# Altium PCB netuitval.PcbDoc (part 1 of 2)
Units mil, origin at the board's own origin, x right, y up, seen from the top; angles counter-clockwise.
Board outline 3892 x 5388 mil, 2 copper layers (Top Layer, Bottom Layer); 66 components, 53 nets, 247 pads, 55 vias.
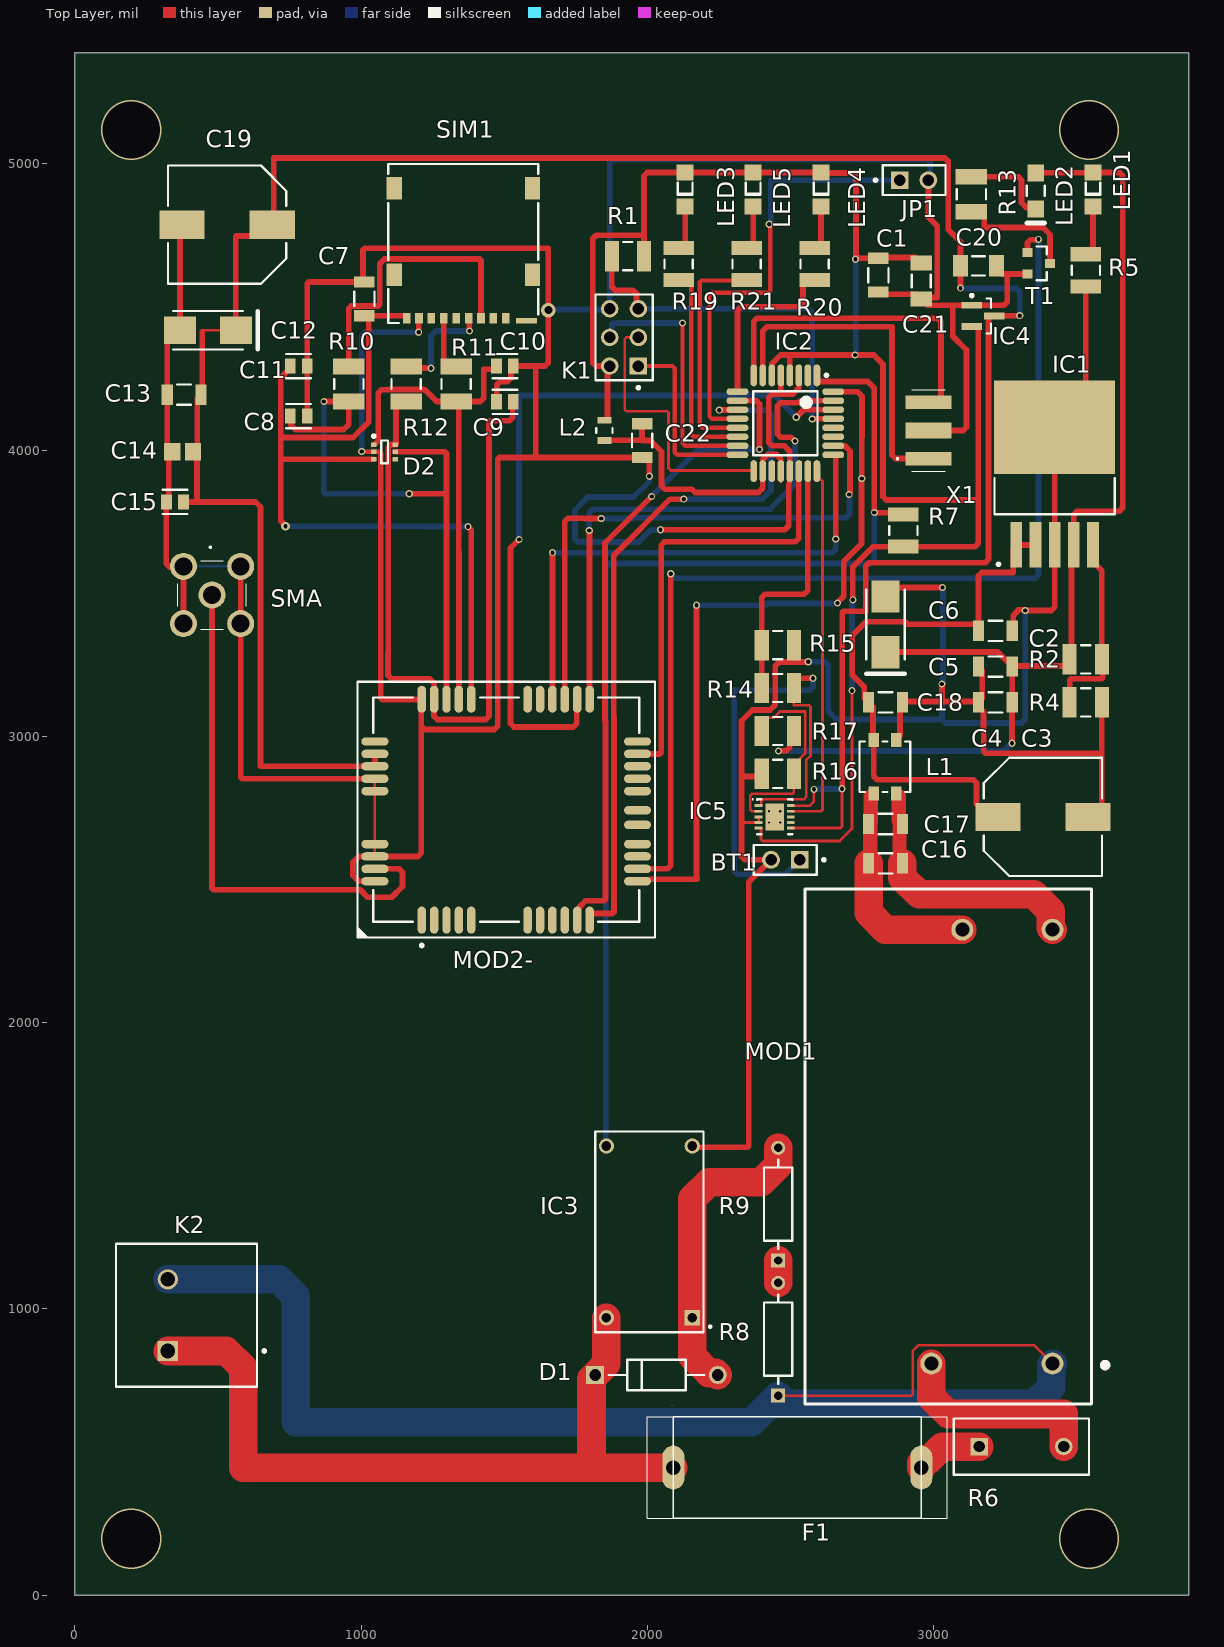
[diagram p0: Top Layer view]
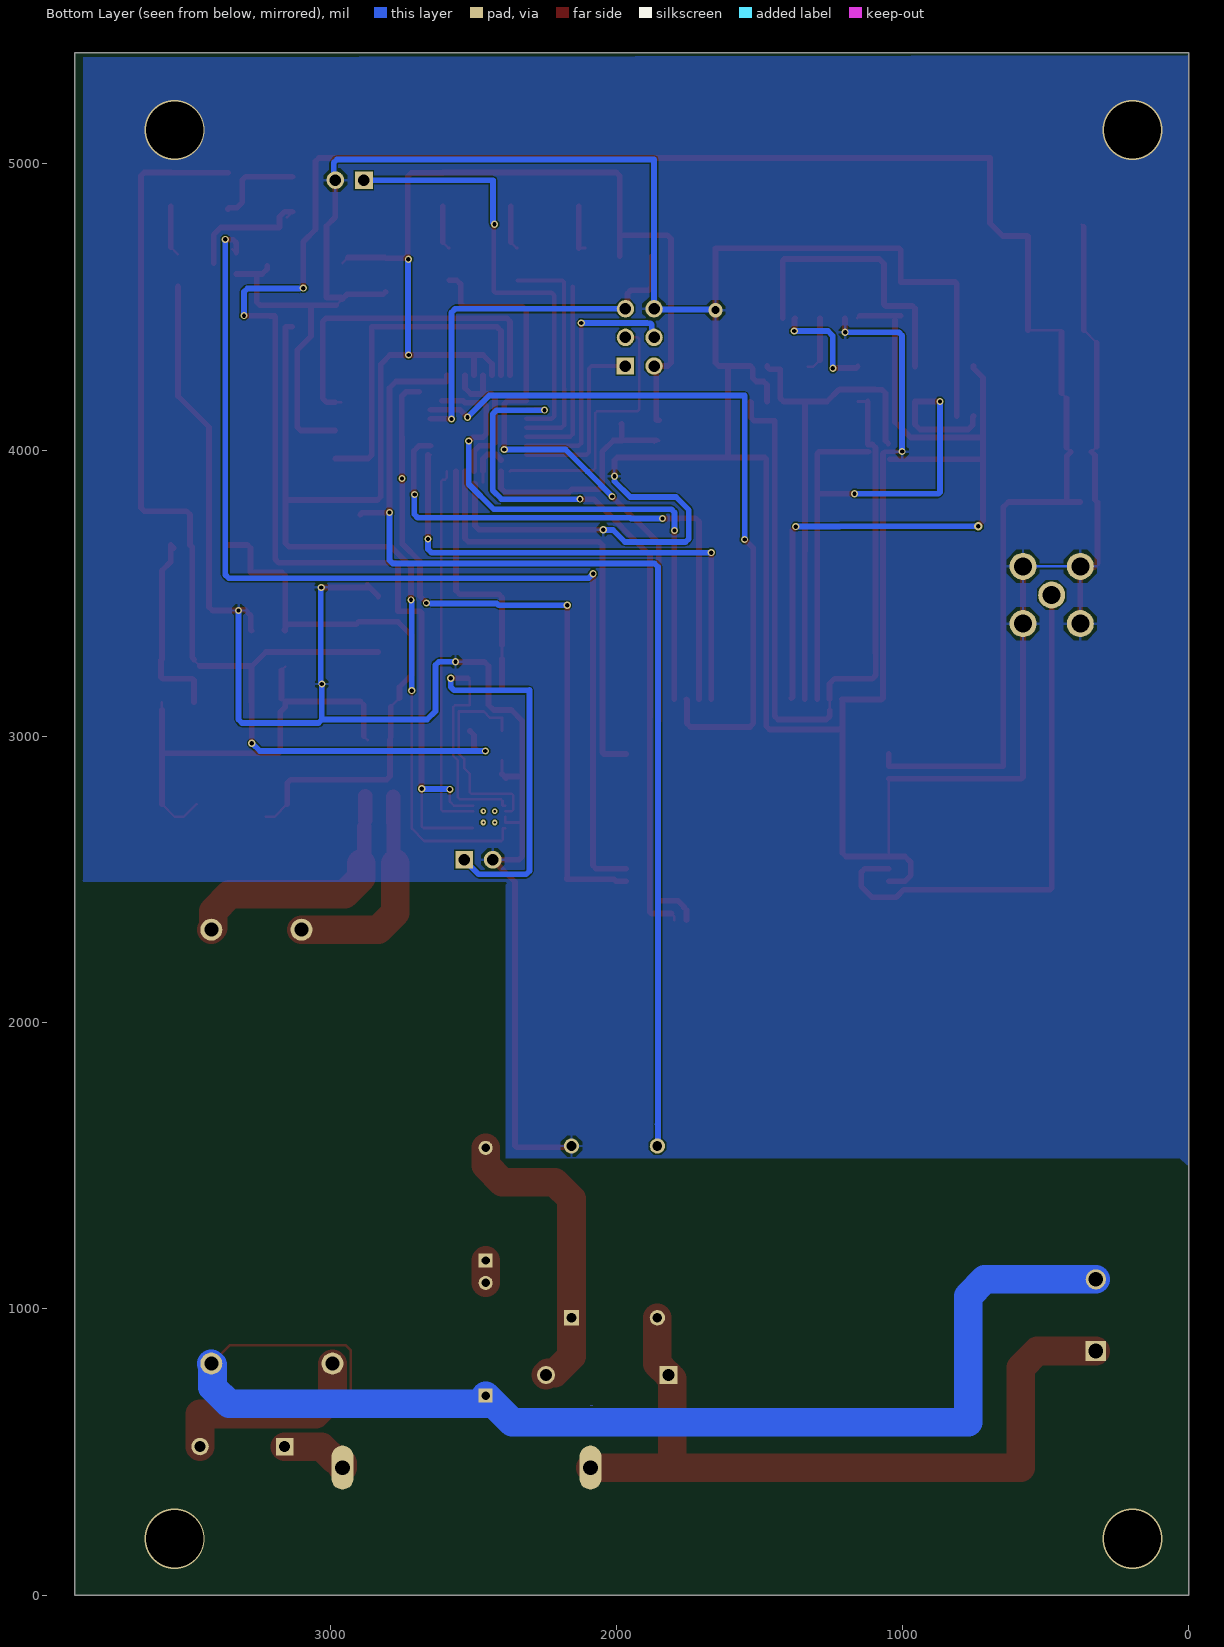
[diagram p1: Bottom Layer view, seen from below]
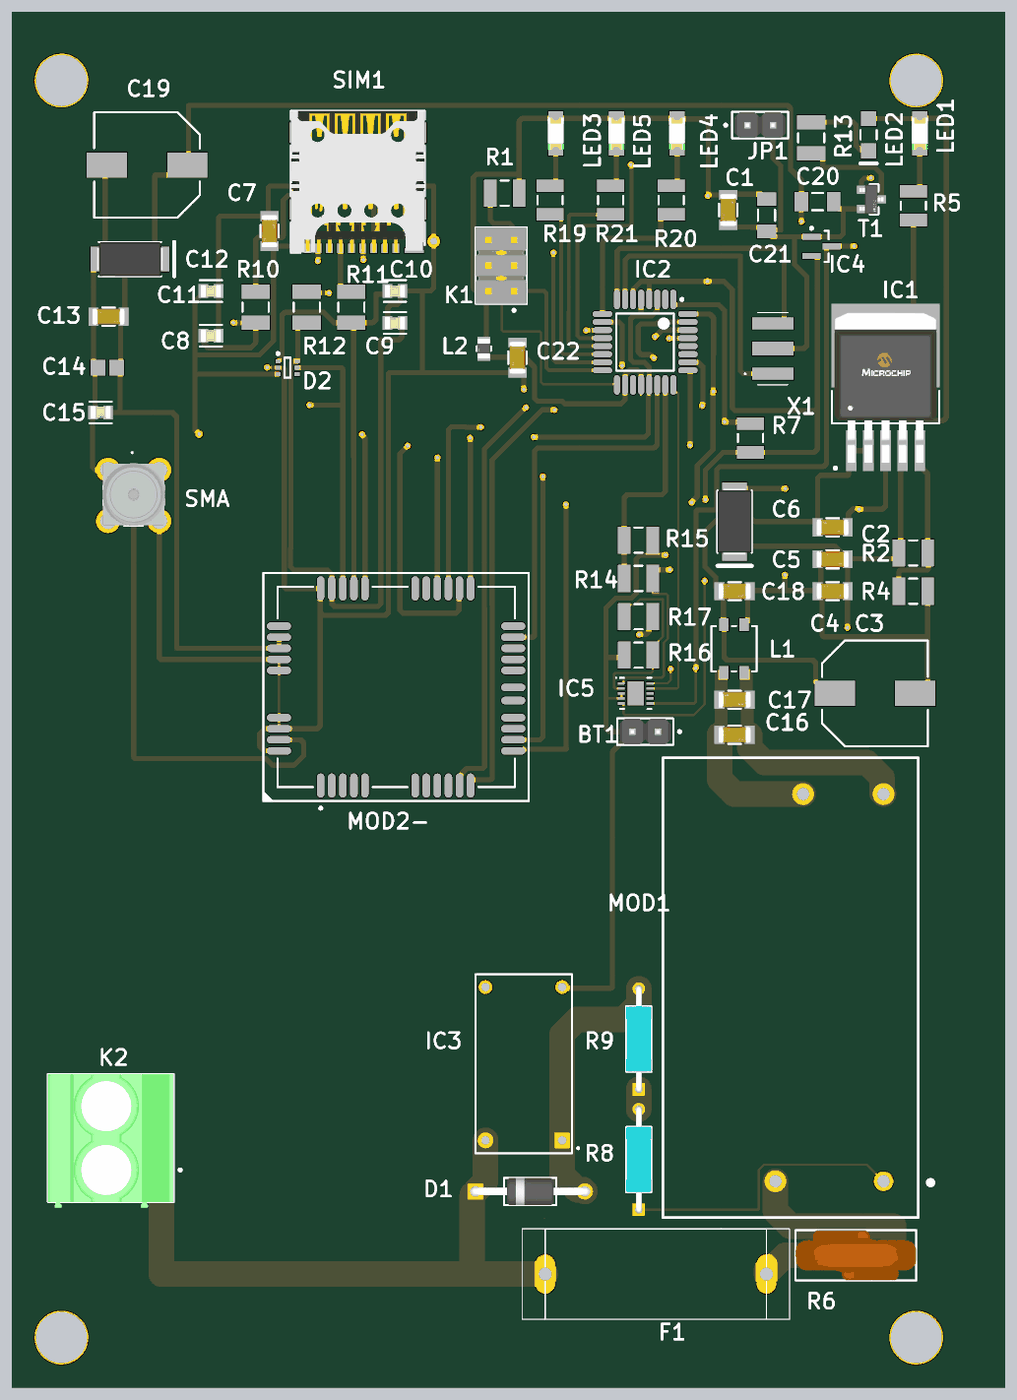
[diagram p2: 3D render of the assembled board from above, using the file's embedded part models]

## Layer stack, top to bottom
Top Solder: solder mask 0.4, Solder Resist, Dk 3.5
Top Layer: signal copper 1.4
Dielectric 1: dielectric 12.6, FR-4, Dk 4.8
Bottom Layer: signal copper 1.4
Bottom Solder: solder mask 0.4, Solder Resist, Dk 3.5

## Board outline
0,0 3892,0 3892,5388 0,5388

## Design rules (kind name [scope] priority, off if disabled: settings)
Clearance [All] p1: gap=8 ignorepadtopadclearanceinfootprint=FALSE
PolygonConnect [All] p1: connectstyle=Relief reliefconductorwidth=10 reliefentries=4 polygonreliefangle="90 Angle" airgapwidth=10
RoutingVias [All] p1: holewidth=28 width=50 viastyle="Through Hole" minholewidth=28 minwidth=50 maxholewidth=28 maxwidth=50
SolderMaskExpansion [All] p1: expansion=4 istentingtop=FALSE
Width [All] p1: maxlimit=100 minlimit=9 preferedwidth=20 minimp=50.000000 maximp=50.000000 favimp=50.000000
30 further rules are at their usual default settings.

## Classes and differential pairs
component class Schema_rechtsonder: C7 C8 C9 C10 C11 C12 C13 C15 C19 C20 C21 IC4 LED2 MOD2- R11 R12 SIM1 T1
component class Schema_linksonder: BT1 C1 C2 C3 C4 C5 C6 C16 C17 C18 C22 D1 D2 F1 IC1 IC3 IC5 K2 L2 LED1 R1 R2 R4 R5 R7 R8 R9 R14 R15 R16 R17 R19 R20 R21 X1

## Components (designator, comment, footprint, x,y, rotation, side; value= is the part's Value field where it differs from the comment)
BT1 "" FP-M20-9990246-MFG 2482,2569 r180 top
C1 "100nF" FP-CC1206-1_25-MFG 2807,4611.52 r270 top value="100 nF"
C2 "100nF" FP-CC1206-1_25-MFG 3216.06,3369 r0 top value="100 nF"
C3 "1000uF/10V" NIC-CAPA2-10X10_V 3382,2719 r0 top
C4 "100nF" FP-CC1206-1_25-MFG 3216.05,3119 r180 top value="100 nF"
C5 "100nF" FP-CC1206-1_25-MFG 3216.06,3244 r180 top value="100 nF"
C6 "100uF/16V" AVX-TAJ-C-2_M 2832,3391.44 r90 top
C7 "100nF" FP-CC1206-1_25-MFG 1011.43,4528.78 r90 top value="100 nF"
C8 "33pF" FP-C0805C-DN-MFG 782,4119 r0 top value="33 pF"
C9 "33pF" FP-C0805C-DN-MFG 1502.47,4169 r0 top value="33 pF"
C10 "33pF" FP-C0805C-DN-MFG 1502.47,4294 r0 top value="33 pF"
C11 "33pF" FP-C0805C-DN-MFG 782,4294 r0 top value="33 pF"
C12 "100uF/16V" AVX-TAJ-C-2_M 465.07,4419 r180 top
C13 "100nF" FP-CC1206-1_25-MFG 381.41,4194 r180 top value="100 nF"
C14 "10pF" CAPC2013X145X50ML20T20 376.49,3994 r0 top
C15 "33pF" FP-C0805C-DN-MFG 349.91,3819 r180 top value="33 pF"
C16 "100nF" FP-CC1206-1_25-MFG 2832,2556.6 r0 top value="100 nF"
C17 "100nF" FP-CC1206-1_25-MFG 2832,2694 r0 top value="100 nF"
C18 "100nF" FP-CC1206-1_25-MFG 2832,3119 r0 top value="100 nF"
C19 "1000uF/10V" NIC-CAPA2-10X10_V 532,4787.7 r180 top
C20 "1uF" CAPC1206(3216)130_M 3157,4644 r180 top
C21 "1uF" CAPC1206(3216)130_M 2957,4590.85 r90 top
C22 "100nF" FP-CC1206-1_25-MFG 1982,4033.57 r270 top value="100 nF"
D1 "1N4007" FP-1N4007-MFG 2032,769 r0 top value=15pF
D2 "SMF05CT2G" ONSC-SC70-6-419B-02_W_V 1082,3994 r0 top
F1 "315mA" MC000827 2090.86,622.8 r0 top
IC1 "MIC29302WU-TR" FP-C04-012-MFG 3423,3965.75 r0 top
IC2 "ATmega328P-AU" 32A_M 2482,4094 r270 top
IC3 "CNY65B" DIP762W50P1524L1780H610Q4 2007,1269 r180 top
IC4 "MCP1700T-2802E/TT" SOT-23-TT3_M 3172.75,4469 r0 top
IC5 "LTC4413" LT-DD-10_V 2444.99,2719 r0 top
JP1 "closed=factory defaults" FP-M20-9990246-MFG 2932,4943.41 r0 top
K1 "ISP" SMTC-TSW-103-08-L-D_V 1918.61,4394 r90 top
K2 "" PHOE-1714955_V 325,978 r90 top
L1 "ACM4520-231-2P-T" ACM4520 2830.03,2894 r90 top
L2 "BLM21AJ601SN1D" FP-BLM21-0_2-t0_85-e0_5-MFG 1850.11,4069 r270 top
LED1 "POWER" 1206_A 3557,4910.73 r90 top
LED2 "NET" LUMX-SML-LX1206GC-TR_V 3357,4905.81 r270 top
LED3 "" 1206_A 2132,4910.73 r90 top
LED4 "" 1206_A 2607,4910.73 r90 top
LED5 "" 1206_A 2369.5,4910.73 r90 top
MOD1 "IRM-10-5" IRM-10 3551.06,667.27 r90 top
MOD2- "M95FA-03-STD" QUEC-M95FA-03-STD_V 1507,2744 r90 top
R1 "10K" RESC3225X70X50NL20T20 1932,4677.66 r0 top
R2 "110K" RESC3225X70X50NL20T20 3531.61,3269 r0 top
R4 "43K" RESC3225X70X50NL20T20 3531.61,3119 r180 top
R5 "1K" RESC3225X70X50NL20T20 3532,4628.25 r90 top
R6 "NTC" FP-NTPAA-MFG 3307,519 r0 top
R7 "4K7" RESC3225X70X50NL20T20 2894.4,3719 r270 top
R8 "47K" FP-MRS25-MFG 2457,894 r90 top value=1.1kΩ
R9 "47K" FP-MRS25-MFG 2457,1365.85 r90 top value=1.1kΩ
R10 "22R" RESC3225X60X45ML20T20 957,4231.01 r90 top
R11 "22R" RESC3225X60X45ML20T20 1332,4231.01 r270 top
R12 "22R" RESC3225X60X45ML20T20 1157,4231.01 r270 top
R13 "1K" RESC3225X60X45ML20T20 3132,4894 r90 top
R14 "100K" RESC3225X70X50NL20T20 2455.82,3169 r180 top
R15 "100K" RESC3225X70X50NL20T20 2455.82,3319 r180 top
R16 "470K" RESC3225X70X50NL20T20 2455.82,2869 r0 top
R17 "1M" RESC3225X70X50NL20T20 2455.82,3019 r0 top
R19 "470R" RESC3225X70X50NL20T20 2109.36,4650.1 r90 top
R20 "1K" RESC3225X70X50NL20T20 2584.36,4650.1 r90 top
R21 "1K" RESC3225X70X50NL20T20 2346.86,4650.1 r90 top
SIM1 "693023010811" 693023010811 1357,4721.76 r180 top
SMA "73391-0070" 733910070 479.44,3494 r0 top
T1 "2N7002-7-F" FP-SOT23-MFG 3367.63,4652.86 r0 top
X1 "" CSTCC8M00G53R0 2982,4068.8 r270 top

## Footprints (in the part's own frame and the unit in brackets; to place one, negate y for a bottom-side part, rotate by r counter-clockwise, add the part's x,y. Pads: shape width x height; smd on the part's side, far side on the other; paste and mask are expansions set on the pad)
32A_M [mm] "Thin QFP, 32-Leads, Body 7x7mm, Pitch 0.8mm, IPC Low Density"
  oval 1.95x0.6 smd: 1(-4.25,2.8) 2(-4.25,2) 3(-4.25,1.2) 4(-4.25,0.4) 5(-4.25,-0.4) 6(-4.25,-1.2) 7(-4.25,-2) 8(-4.25,-2.8) 17(4.25,-2.8) 18(4.25,-2) 19(4.25,-1.2) 20(4.25,-0.4) 21(4.25,0.4) 22(4.25,1.2) 23(4.25,2) 24(4.25,2.8)
  oval 0.6x1.95 smd: 9(-2.8,-4.25) 10(-2,-4.25) 11(-1.2,-4.25) 12(-0.4,-4.25) 13(0.4,-4.25) 14(1.2,-4.25) 15(2,-4.25) 16(2.8,-4.25) 25(2.8,4.25) 26(2,4.25) 27(1.2,4.25) 28(0.4,4.25) 29(-0.4,4.25) 30(-1.2,4.25) 31(-2,4.25) 32(-2.8,4.25)
  silkscreen extent -4.37,-2.85 2.85,3.78, body extent -3.5,-3.5 3.5,3.5, height 1.2
1206_A [mm] "Chip LED, 2-Leads, Body 3.2x1.6mm, IPC Medium Density"
  rect 1.4x1.5 smd: 1(-1.5,0) 2(1.5,0)
  silkscreen extent -0.5,-0.67 0.6,0.65, body extent -1.6,-0.8 1.6,0.8, height 0.68
733910070 [mm]
  round 2.4 hole 1.6: 1(0,0) 2(-2.54,2.54) 3(-2.54,-2.54) 4(2.54,-2.54) 5(2.54,2.54)
  silkscreen extent -3.04,-3.04 3.04,4.3, body extent -3.12,-3.03 3.12,3.21, height 9.54
693023010811 [mm] "Micro SIM Card Connector (Mega SIM) Push & Pull - with Card Detection - 8 Pins"
  rect 0.67x0.95 smd: C1(5.03,6.625) C2(1.73,6.625) C3(-0.47,6.625) C4(-2.67,6.625) C5(3.93,6.625) C6(0.63,6.625) C7(-1.57,6.625) C8(-3.77,6.625) SW(2.83,6.625)
  rect 1.35x2 smd: Shield(-6.13,2.75) Shield(-6.13,-4.9) Shield(6.13,2.75) Shield(6.13,-4.9)
  rect 1.89x0.5 smd: Shield(-5.615,6.85)
  silkscreen extent -6.65,-7.05 6.65,7.05, body extent -6.65,-7.05 6.65,7.05, height 1.3
ACM4520 [mm]
  rect 1.25x0.95 smd: 1(-2.375,1) 2(-2.375,-1) 3(2.375,-1) 4(2.375,1)
  silkscreen extent -2.25,-2.25 2.25,2.25
AVX-TAJ-C-2_M [mm] "Molded Capacitor, 2-Leads, Body 6.2x3.4mm, IPC Low Density"
  rect 2.85x2.45 smd: 1(-2.475,0) 2(2.475,0)
  silkscreen extent -4.4,-1.7 3.1,1.7, body extent -3.32,-1.7 3.32,1.7, height 2.8
CAPC1206(3216)130_M [mm] "Chip Capacitor, Body 3.2x1.6mm, Height 1.3mm, IPC Low Density"
  rect 1.35x1.9 smd: 1(-1.6,0) 2(1.6,0)
  silkscreen extent -0.55,-0.85 0.55,0.85, body extent -1.7,-0.9 1.7,0.9, height 1.3
CAPC2013X145X50ML20T20 [mm] "Chip Capacitor, 2-Leads, Body 2.00x1.25mm, IPC Low Density"
  rect 1.45x1.55 smd: 1(-0.925,0) 2(0.925,0)
  body extent -1.1,-0.72 1.1,0.72, height 1.45
CSTCC8M00G53R0 [mm]
  rect 1.2x4.1 smd: 1(2.5,0) 3(-2.5,0)
  rect 1.4x4.1 smd: 2(0,0)
  silkscreen extent -3.6,-2.8 3.6,1.5
DIP762W50P1524L1780H610Q4 [mm]
  rect 1.358x1.358 hole 0.85: 1(-3.81,7.62)
  round 1.358 hole 0.85: 2(-3.81,-7.62) 3(3.81,-7.62) 4(3.81,7.62)
  silkscreen extent -5.5,-8.9 4.8,8.9
FP-1N4007-MFG [mm]
  rect 1.6x1.6 hole 1.05 paste-1000 mask+0: 1(-5.438,0)
  round 1.6 hole 1.05 paste-1000 mask+0: 2(5.438,0)
  silkscreen extent -4.24,-1.35 4.24,1.35, body extent -6.34,-1.45 6.34,1.45, height 0.25
FP-BLM21-0_2-t0_85-e0_5-MFG [mm]
  rect 0.6x1.25 smd paste+0 mask+0: 1(-0.9,0) 2(0.9,0)
  silkscreen extent -0.23,-0.73 0.22,0.72, body extent -1.3,-0.82 1.3,0.82, height 0.25
FP-C04-012-MFG [mil]
  rect 41x159 smd paste+0 mask+0: 1(-134,-296.75) 2(-67,-296.75) 3(0,-296.75) 4(67,-296.75) 5(134,-296.75)
  rect 423x327 smd paste+0 mask+0: 6(0,114.75)
  silkscreen extent -210,-370 210,-64, body extent -215,-380 215,282, height 10
FP-C0805C-DN-MFG [mm]
  rect 0.95x1.35 smd paste+0 mask+0: 1(-0.75,0) 2(0.75,0)
  silkscreen extent -1.1,-1.07 1.1,1.07, body extent -1.4,-0.85 1.4,0.85, height 0.25
FP-CC1206-1_25-MFG [mm]
  rect 1x1.8 smd paste+0 mask+0: 1(-1.5,0) 2(1.5,0)
  silkscreen extent -0.63,-0.9 0.62,0.9, body extent -2.2,-1.25 2.2,1.25, height 0.25
FP-M20-9990246-MFG [mm]
  rect 1.57x1.57 hole 1.02 paste-1000 mask+0: 1(-1.27,0)
  round 1.57 hole 1.02 paste-1000 mask+0: 2(1.27,0)
  silkscreen extent -3.55,-1.32 2.79,1.32, body extent -2.89,-1.42 2.89,1.42, height 0.25
FP-MRS25-MFG [mm]
  rect 1.25x1.25 hole 0.75 paste-1000 mask+0: 1(-5,0)
  round 1.25 hole 0.75 paste-1000 mask+0: 2(5,0)
  silkscreen extent -3.97,-1.25 3.98,1.25, body extent -5.72,-1.35 5.72,1.35, height 0.25
FP-NTPAA-MFG [mm]
  rect 1.55x1.55 hole 1 paste-1000 mask+0: 1(-3.75,0)
  round 1.55 hole 1 paste-1000 mask+0: 2(3.75,0)
  silkscreen extent -6,-2.5 6,2.5, body extent -6.1,-2.6 6.1,2.6, height 0.25
FP-SOT23-MFG [mm]
  rect 0.9x0.8 smd paste+0 mask+0: 1(-1,0.95) 2(-1,-0.95) 3(1,0)
  silkscreen extent -0.18,-1.5 0.7,1.5, body extent -1.55,-1.6 1.55,1.6, height 0.25
IRM-10 [mm]
  round 1.95 hole 1.24: 1(3.6,3.45) 2(42.1,3.45) 3(42.1,11.45) 4(3.6,14.2)
  silkscreen extent 0,-1.34 45.7,25.4
LT-DD-10_V [mm] "SON, 10-Leads, Body 3x3mm, Pitch 0.5mm, Thermal Pad 2.38x1.65mm"
  rect 0.7x0.25 smd mask+0.102: 1(-1.425,1) 2(-1.425,0.5) 3(-1.425,0) 4(-1.425,-0.5) 5(-1.425,-1) 6(1.425,-1) 7(1.425,-0.5) 8(1.425,0) 9(1.425,0.5) 10(1.425,1)
  rect 1.65x2.38 smd mask+0.102: 11(0,0)
  silkscreen extent -2,-1.55 1.55,1.6, body extent -1.5,-1.5 1.5,1.5, height 0.8
LUMX-SML-LX1206GC-TR_V [mm] "SMD, 2-Leads, Body 3.2x1.6mm"
  rect 1.5x1.5 smd: 1(-1.6,0) 2(1.6,0)
  silkscreen extent -0.45,-0.8 2.85,0.8, body extent -1.6,-0.8 1.6,0.8, height 1.1
MC000827 [mm]
  oval 1.95x3.9 hole 1.3: P$1(22,-4.5) P$2(0,-4.5)
  silkscreen extent -2.3,-9 24.3,0
NIC-CAPA2-10X10_V [mm] "Aluminum Electrolytic Capacitor, Diameter 10mm, Height 10.8mm, Pitch 8mm"
  rect 4x2.5 smd: 1(-4,0) 2(4,0)
  silkscreen extent -5.25,-5.25 5.25,5.25, body extent -4.96,-4.99 5,4.99, height 10.8
ONSC-SC70-6-419B-02_W_V [mm] "SOT23, 6-Leads, Body 2x1.25mm, Pitch 0.65mm"
  rect 0.5x0.4 smd: 1(-0.95,0.65) 2(-0.95,0) 3(-0.95,-0.65) 4(0.95,-0.65) 5(0.95,0) 6(0.95,0.65)
  silkscreen extent -1.07,-1 0.3,1.52, body extent -0.63,-1 0.63,1, height 1.1
PHOE-1714955_V [mm] "Terminal Block, 2-Leads, Body 12.7x12.5mm, Pitch 6.35mm"
  rect 1.8x1.8 hole 1.3: 1(-3.175,0)
  round 1.8 hole 1.3: 2(3.175,0)
  silkscreen extent -6.35,-8.68 6.35,4.6, body extent -6.92,-7.9 6.35,4.6, height 21.51
QUEC-M95FA-03-STD_V [mm] "Module, 42-Leads, Body 23.6x19.9mm"
  oval 2.4x0.75 smd paste+0: 1(-9.8,7.5) 2(-9.8,6.4) 3(-9.8,5.3) 4(-9.8,4.2) 5(-9.8,3.1) 6(-9.8,-1.9) 7(-9.8,-3) 8(-9.8,-4.1) 9(-9.8,-5.2) 10(-9.8,-6.3) 11(-9.8,-7.4) 21(9.8,-7.4) 22(9.8,-6.3) 23(9.8,-5.2) 24(9.8,-4.1) 25(9.8,-3) 26(9.8,-1.9) 27(9.8,3.1) 28(9.8,4.2) 29(9.8,5.3) 30(9.8,6.4) 31(9.8,7.5)
  oval 0.75x2.4 smd paste+0: 12(-6.35,-11.65) 13(-5.25,-11.65) 14(-4.15,-11.65) 15(-3.05,-11.65) 16(1.65,-11.65) 17(2.75,-11.65) 18(3.85,-11.65) 19(4.95,-11.65) 20(6.05,-11.65) 32(6.05,11.65) 33(4.95,11.65) 34(3.85,11.65) 35(2.75,11.65) 36(1.65,11.65) 37(-3.05,11.65) 38(-4.15,11.65) 39(-5.25,11.65) 40(-6.35,11.65) 41(-1.35,-11.65) 42(-0.05,-11.65)
  silkscreen extent -12.17,-13.2 11.35,13.2, body extent -9.95,-11.8 9.95,11.8, height 2.65
RESC3225X60X45ML20T20 [mm] "Chip Resistor, 2-Leads, Body 3.20x2.50mm, IPC Low Density"
  rect 1.4x2.8 smd: 1(-1.55,0) 2(1.55,0)
  silkscreen extent -0.45,-1.3 0.45,1.3, body extent -1.7,-1.35 1.7,1.35, height 0.6
RESC3225X70X50NL20T20 [mm] "Chip Resistor, 2-Leads, Body 3.20x2.50mm, IPC Medium Density"
  rect 1.25x2.7 smd: 1(-1.425,0) 2(1.425,0)
  silkscreen extent -0.4,-1.25 0.4,1.25, body extent -1.7,-1.35 1.7,1.35, height 0.7
SMTC-TSW-103-08-L-D_V [mm] "CONN, 6-Leads, Body 7.62x5.08mm, Pitch 2.54mm"
  rect 1.55x1.55 hole 1.02: 1(-2.54,-1.27)
  round 1.55 hole 1.02: 2(-2.54,1.27) 3(0,-1.27) 4(0,1.27) 5(2.54,-1.27) 6(2.54,1.27)
  silkscreen extent -4.58,-2.54 3.81,2.54, body extent -3.81,-2.54 3.81,2.54, height 8.38
SOT-23-TT3_M [mm] "SOT23, 3-Leads, Body 2.9x1.3mm, Pitch 0.95mm, Lead Span 2.4mm, IPC Low Density"
  rect 1.8x0.6 smd: 1(-1,0.95) 2(-1,-0.95) 3(1,0)
  silkscreen extent -1.12,-1.55 0.7,1.92, body extent -0.7,-1.52 0.7,1.53, height 1.12

## Part data
BT1 JP1: library part CMP-15831-000009-1, "CONN HEADER VERT 2POS 2.54MM", Current Rating=3A, Manufacturer=Harwin, Manufacturer Part Number=M20-9990246, Temperature="-40°C to +105°C", Temperature Range High=+105°C, Temperature Range Low=-40°C, Automotive=No, Category=Conn, ComponentLink2Description=Datasheet, ComponentLink2URL=https://cdn.harwin.com/pdfs/M20-999.pdf, Conn Gender=Male, Conn Orientation=Vertical, Contact Material=Tin,Nickel, Device Class L1=Connectors, Device Class L2="Headers and Wire Housings", Device Class L3=unset, Digikey Description="CONN HEADER VERT 2POS 2.54MM", Height=8.99mm, Lead Free=Yes, Mouser Description="2.54mm (0.1\") Pitch SIL Vertical PC Tail Pin Header, 6.1mm mating pin height, tin, 2 contacts", Number of contacts=2, Number of Rows=1, Octopart=https://octopart.com/m20-9990246-harwin-2590635, Package=M20-9990246, Pitch=2.54mm, RoHS=TRUE
C1 C2 C4 C5 C7 C13 C16 C17 C18 C22: library part CMP-03422-000842-1, "CAP CER 0.1UF 50V X7R 1206", Capacitance="100 nF", Manufacturer=Yageo, Manufacturer Part Number=CC1206KRX7R9BB104, Package=CC1206-1.25, Temperature="-55°C to +125°C", Temperature Characteristic=X7R, Temperature Coefficient=15%, Temperature Range High=+125°C, Temperature Range Low=-55°C, Tolerance=0.1, Voltage Rating="50 V", Automotive=No, Automotive Grade=NA, Category=Cap, ComponentLink2Description=Datasheet, ComponentLink2URL=http://www.yageo.com/documents/recent/UPY-NP0X7R_HV_1KV-to-3KV_11.pdf, Device Class L1="Passive Components", Device Class L2=Capacitors, Device Class L3="Ceramic Capacitors", Digikey Description="CAP CER 0.1UF 50V X7R 1206", Footprint Url=http://www.yageo.com/exep/pages/download/literatures/UPY-C_GEN_24.pdf, Height=1.45mm, Lead Free=Yes, Material=Ceramic, Mouser Description="Multilayer Ceramic Capacitors MLCC - SMD/SMT 100nF 50V X7R 10%", Octopart=https://octopart.com/cc1206krx7r9bb104-yageo-39467816, RoHS=TRUE
C3 C19: library part CMP-0687-00006-1, "Aluminum Electrolytic Capacitor, UD Series, Low Impedance, 1000 uF, 10 V, + / - 20%, -55 to 105 degC, Chip Type, 10 x 10 mm D x L, Pb-Free, Reel", Manufacturer=Nichicon, PartNumber=UUD1A102MNL1GS, Rated Capacitance="1000 uF", Rated Ripple Current (at 100kHz)="670 mA", Rated Voltage="10 V", Tolerance Rated Capacitance="-20 to 20%", ComponentLink1Description="Manufacturer URL", ComponentLink1URL=http://www.nichicon.co.jp/, ComponentLink2Description=Datasheet, ComponentLink2URL=http://products.nichicon.co.jp/en/pdf/XJA043/e-ud.pdf, ComponentLink3Description="Package Specification", ComponentLink3URL=http://products.nichicon.co.jp/en/pdf/XJA043/e-ud.pdf, DatasheetVersion=08/2012, Diameter="10 mm", Endurance Time="5000 h", Impedance="0.09 Ohm", Length="10 mm", Mounting Technology="Surface Mount", PackageDescription="2-Pin Surface Mount Device, Diameter 10 mm, Height 10 mm, Pitch 8 mm", PackageReference=CAPAE-D10H10, Packing="Dia382mm Reel", RoHS=TRUE
C6 C12: library part CMP-2100-03691-1, "Standard Tantalum, 100 uF, +/- 10%, 16 V, -55 to 125 degC, 2-Pin SMD (2312), RoHS, Tape and Reel", Capacitance=100uF, Case Code (Imperial)=2412, Case Code (Metric)=6032, Case/Package=Molded, ESR (Equivalent Series Resistance)=1Ohm, Leakage Current=16uA, Manufacturer=AVX, Max Operating Temperature=125degC, Min Operating Temperature=-55degC, Package Description="2-Pin Surface Mount Device, Body 6 x 3.25 mm", Package Quantity=1, Package Reference=TAJ-C-2, Tolerance=10%, Voltage Rating=16V, Datasheet URL=http://datasheets.avx.com/TAJ.pdf, Datasheet Version=42401.0, Depth=3.2mm, Dissipation Factor=8%, Height=2.8mm, Height - Seated (Max)=0.11inch, Lead Free=LeadFree, Length=6mm, Manufacturer URL=http://www.avx.com/, Number of Pins=2, Packaging=TapeandReel, Polarity=Polar, Radiation Hardening=No, REACH SVHC=NoSVHC, Resistance=1Ohm, RoHSCompliant=True, Termination=SMD/SMT, Voltage Rating (DC)=16V, Width=3.2mm
C8 C9 C10 C11 C15: library part CMP-2007-00359-2, "CAP CER 33PF 50V 1% NP0 0805", Capacitance="33 pF", Manufacturer=KEMET, Manufacturer Part Number=C0805C330F5GACTU, Package=C0805C-DN, Temperature="-55°C to +125°C", Temperature Characteristic=C0G, Temperature Coefficient=30ppm/°C, Temperature Range High=+125°C, Temperature Range Low=-55°C, Tolerance=0.01, Voltage Rating="50 V", Automotive=No, Category=Cap, ComponentLink2Description=Datasheet, ComponentLink2URL=https://content.kemet.com/datasheets/KEM_C1003_C0G_SMD.pdf, Device Class L1="Passive Components", Device Class L2=Capacitors, Device Class L3="Ceramic Capacitors", Digikey Description="CAP CER 33PF 50V 1% NP0 0805", Height=0.88mm, Ipc Land Pattern Name=CAPC200125X78, Lead Free=Yes, Material=Ceramic, Mouser Description="Mlcc Capacitor, 33Pf, 50V, C0G, 1%, 0805, Full Reel", Octopart=https://octopart.com/c0805c330f5gactu-kemet-9138632, RoHS=TRUE
C14: library part CMP-1036-00854-2, Manufacturer=Vitramon, Part Number=VJ0805A100FXACW1BC
C20 C21: library part CMP-1037-04673-1, "CAP 1uF 10V ±10% 1206 (3216 Metric) Thickness 1.3mm SMD", Case-EIA=1206, Case-Metric=3216, Rated Voltage="10 V", Tolerance=Â±10%, Max Thickness="1.3 mm", Technology=SMT
D1: library part CMP-02540-000046-1, "DIODE GEN PURP 1KV 1A DO204AL", Capacitance=15pF, Forward Current=1A, Manufacturer=Vishay, Manufacturer Part Number=1N4007-E3/54, Max Junction Temp=+150°C, Max Repetitive Reverse Voltage=1000V, Max Surge Forward Current=30A, Peak Reverse Current=30uA, Temperature="-50°C to +150°C", Temperature Range Low=-50°C, Automotive=No, Category=Diode, ComponentLink2Description=Datasheet, ComponentLink2URL=http://www.vishay.com/docs/88503/1n4001.pdf, Device Class L1="Discrete Semiconductors", Device Class L2=Diodes, Device Class L3="Rectifier Diodes", Digikey Description="DIODE GEN PURP 1KV 1A DO204AL", Height=2.7mm, Ipc Land Pattern Name=DIOPA1088W105L520D270, Lead Free=Yes, Mouser Description="Rectifiers Vr/1000V Io/1A", Octopart=https://octopart.com/1n4007-e3%2F54-vishay-39548207, Package=1N4007, RoHS=TRUE, Temperature Range High=+150°C
D2: library part CMP-1061-00157-1, "5-Line Transient Voltage Suppressor Array, 6-Pin SC70, Pb-Free, Tape and Reel", Manufacturer="On Semiconductor", ComponentLink1Description="Manufacturer URL", ComponentLink1URL=http://www.onsemi.com/, ComponentLink2Description=Datasheet, ComponentLink2URL=http://www.onsemi.com/pub_link/Collateral/SMF05C-D.PDF, ComponentLink3Description="Package Specification", ComponentLink3URL=http://www.onsemi.com/pub_link/Collateral/SMF05C-D.PDF, DatasheetVersion="Rev. 4", Direction=Unidirectional, IR Max (uA)=5, Mounting Technology="Surface Mount", PackageDescription="6-Pin Small Outline Transistor, Body 2 x 1.25 mm, Pitch 0.65 mm", PackageReference=SC70-6-419B-02_W, PackageVersion="Rev. W", Packing="Tape and Reel", PartNumber=SMF05CT2G, PPK Max (W)=100, RoHS=Pb-Free
F1: library part MC000827, "Fuse Holder, 250 V, 6.3 A, Pcb Fuse Holder, Through Hole, 1", Package=None, Availability=Unavailable, Check_prices=https://www.snapeda.com/parts/MC000827/Multicomp/view-part/2895630/?ref=eda, MF=Multicomp, MP=MC000827, Price=None, SnapEDA_Link=https://www.snapeda.com/parts/MC000827/Multicomp/view-part/2895630/?ref=snap
IC1: library part CMP-06324-000007-1, "IC REG LINEAR POS ADJ 3A TO263-5", Dropout Voltage=370mV, Manufacturer=Microchip, Max Junction Temp=+125°C, Max Supply Voltage=26V, Min Supply Voltage=2.25V, Nominal Supply Current=10-37mA, Output Current=3A, Output Voltage=3.3-12V, Package=C04-012, Temperature="-40°C to +125°C", Temperature Range Low=-40°C, Accuracy Percentage=1%, Automotive=No, Category=IC, ComponentLink2Description=Datasheet, ComponentLink2URL=http://ww1.microchip.com/downloads/en/DeviceDoc/MIC2915x-30x-50x-75x-High-Current-Low-Dropout-Regulators-DS20005685B.pdf, Device Class L1="Integrated Circuits (ICs)", Device Class L2="Power Management ICs", Device Class L3="Voltage Regulators - Linear", Digikey Description="IC REG LINEAR POS ADJ 3A TO263-5", Height=0.2inch, Lead Free=Yes, Manufacturer Part Number=MIC29302WU-TR, Mouser Description="LDO Voltage Regulators", Number Of Outputs=1, Octopart=https://octopart.com/mic29302wu-tr-microchip-66801318, Output Type=AdjustableProgrammable, RoHS=TRUE, Standoff Height=0mm, Temperature Range High=+125°C
IC2: library part CMP-0095-00269-2, "8-bit AVR Microcontroller, 32KB Flash, 1KB EEPROM, 2KB SRAM, 32-pin TQFP, Industrial Grade (-40°C to 85°C)", Code_JEDEC=MS-026-ABA, ComponentLink1Description="Manufacturer URL", ComponentLink1URL=http://www.atmel.com/, ComponentLink2Description="ATmega48A/48PA/88A/88PA/168A/168PA/328/328P Datasheet", ComponentLink2URL=http://www.atmel.com/dyn/resources/prod_documents/doc8271.pdf, ComponentLink3Description="ATmega48A/48PA/88A/88PA/168A/168PA/328/328P Summary", ComponentLink3URL=http://www.atmel.com/dyn/resources/prod_documents/8271S.pdf, DatasheetVersion="revD, May-2011", PackageDescription="32-Lead, 7x7x1.0 mm Body, 0.8mm Lead Pitch, Thin Profile Plastic Quad Flat Package (TQFP)", PackageReference=32A, PackageVersion="revC, Oct-2010", RevisionNote="DatasheetVersion & PackageVersion updated. URLs added."
IC3: Package=None, Availability=Unavailable, MP=CNY65B, Price=None
IC4: library part CMP-0136-00770-1, "Low Quiescent Current LDO, 3-Pin SOT-23, Extended Temperature, Tape and Reel", Code_IPC=SOT23-3, DatasheetVersion="revB, Feb-2007", PackageDescription="3-Lead Plastic Small Outline Transistor (TT) [SOT-23]", PackageReference=SOT-23-TT3, PackageVersion="revBB, Aug-2009"
IC5: library part CMP-0479-00026-1, "Dual 2.6 A, Fast Ideal Diode, Overvoltage Protection Sensor with Drive Output for An External P-Channel MOSFET, 2.6 to 5.5 V Vin, 10-pin SON (DD-10), -40 to 85 degC, Pb-Free", Manufacturer="Linear Technology", PartNumber=LTC4413EDD-2#PBF, Code_JEDEC=MO-229, ComponentLink1Description="Manufacturer URL", ComponentLink1URL=http://www.linear.com/, ComponentLink2Description=Datasheet, ComponentLink2URL=http://cds.linear.com/docs/en/datasheet/441312fd.pdf, ComponentLink3Description="Package Specification", ComponentLink3URL=http://cds.linear.com/docs/en/packaging/DFN_10_05-08-1699.pdf, DatasheetVersion="Rev. D", Ideal Diode="Dual, Internal, P-Channel", Mounting Technology="Surface Mount", PackageDescription="10-Pin Plastic DFN, Body 3 x 3 mm, Pitch 0.5 mm", PackageReference=DD-10, PackageVersion="Rev. C, 06/2010", RoHS=TRUE
K1: library part CMP-1024-00336-5, "Male Header, Pitch 2.54 mm, 2 x 3 Position, Height 8.38 mm, Tail Length 5.08 mm, -55 to 125 degC, RoHS, Bulk", Manufacturer=Samtec, Max Operating Temperature="125 degC", Min Operating Temperature="-55 degC", ComponentLink1Description="Manufacturer URL", ComponentLink1URL=http://www.samtec.com/, ComponentLink2Description=Datasheet, ComponentLink2URL=https://datasheet.ciiva.com/25618/0900766b81154476-25618436.pdf, ComponentLink3Description="Package Specification", ComponentLink3URL=http://suddendocs.samtec.com/prints/tsw-xxx-xx-x-x-xx-xxx-footprint.pdf, DatasheetVersion=04/2012, Lead Pitch="2.54 mm", Mount="Through Hole", Mounting Technology="Through Hole", PackageDescription="Male Header, Pitch 2.54 mm, 2 x 3 Position, Height 8.38 mm, Tail Length 5.08 mm", PackageReference=TSW-103-08-L-D, RoHSCompliant=true
K2: library part CMP-2000-05797-1, "PC Terminal Block, Pitch 6.35 mm, 1 x 2 Position, Height 21.5 mm, Tail Lenght 5.1 mm, RoHS, Bulk", Manufacturer="Phoenix Contact", Package Description="PC Terminal Block, Pitch 6.35 mm, 1 x 2 Position, Height 21.5 mm, Tail Lenght 5.1 mm", Package Reference=1714955, Datasheet URL=http://media.digikey.com/pdf/Data%20Sheets/Phoenix%20Contact%20PDFs/1714955.pdf, Datasheet Version=02/2010, Manufacturer URL=http://www.phoenixcontact.com/, Mounting Technology=ThroughHole
L1: library part ACM4520-231-2P-T000, "Filter", Manufacturer_Name=TDK, RS Part Number=9164134P, Datasheet Link=http://uk.rs-online.com/web/p/products/9164134P, Manufacturer_Part_Number=ACM4520-231-2P-T000, RS Price/Stock=http://uk.rs-online.com/web/p/products/9164134P
L2: library part CMP-0686-00622-4, "Chip Ferrite Bead, 0805, 22Ω @ 100MHz, 0.009Ω, 25%, 6A", Case Code (Imperial)=0805, Case Code (Metric)=2012, Current Rating=6A, DC Resistance (DCR)=9mR, Manufacturer Series=BLM21P, Max Operating Temperature=125°C, Min Operating Temperature=-55°C, Package Quantity=1, Resistance=10mR, Test Frequency=100MHz, Tolerance=25%, Case/Package=0805, Core Material=Ferrite, DC Current=6A, DC Resistance-Max=9mR, Depth=1.25mm, Height=0.85mm, Impedance=22R, Lead Free="Lead Free", Length=2mm, Material=Steel, Max Current Rating=6A, Max DC Current=6A, Number of Circuits=1, Number of Functions=1, Number of Lines=1, Number of Pins=2, Packaging="Tape and Reel", Radiation Hardening=No, REACH SVHC="No SVHC", RoHS Compliant=Yes, Series=BLM21P, Shielding=Unshielded, Terminal Finish=Tin, Termination=SMD/SMT, Weight=0.000194oz, Width=1.25mm
LED1: library part CMP-1426-00019-1, "SMD mono-color Chip LED, WL-SMCW, Yellow", Color=Yellow, Manufacturer="Wuerth Elektronik", PartNumber=150120YS75000, ComponentLink1Description="Manufacturer URL", ComponentLink1URL=http://www.we-online.com, ComponentLink2Description=Datasheet, ComponentLink2URL=http://katalog.we-online.com/led/datasheet/150120YS75000.pdf, PackageReference=1206_A
LED2: library part CMP-2000-07122-1, "Green Led, Water Clear Lens, 10 mcd, 565 nm, 2.2 V, -40 to 85 degC, 2-Pin SMD, RoHS, Tape and Reel", Color=Green, Manufacturer=Lumex, Operating Temperature=-40to85C, Package Description="2-Pin Surface Mount Device, Body 3.2 x 1.6 mm", Package Reference=SML-LX1206GC-TR, Reverse Voltage=5(Min)V, Supplier_Package=SMD, COO=CN, Datasheet URL=http://www.mouser.com/ds/2/244/SML-LX1206GC-TR-112732.pdf, Datasheet Version="Rev. J, 04/2011", Dimension=3.2x1.6x1.1mm, Dominant Wavelength=N/A, ECCN=EAR99, Family=SML-LX1206GC, HTS=8541402000, Intensity=10mcd, LED Material=GaP, Lens Appearance=ColorlessNonDiffused, Lens Dimensions=2x1.6x0.5mm, Manufacturer URL=http://www.lumexinstruments.com/, Mounting=SurfaceMount, Mounting Technology=SurfaceMount, Number of LEDs=1, Packaging=TapeandReel, Part No=SML-LX1206GC-TR, Peak Wavelength=565nm, PIN_COUNT=2, RoHS=Yes, Supplier=Lumex, Supplier Standard Pack=3,000, Type=Uni-Color, Viewing Angle=160
LED3 LED4 LED5: library part CMP-1426-00014-1, "SMD mono-color Chip LED, WL-SMCW, Green", Color=Green, Manufacturer="Wuerth Elektronik", PartNumber=150120GS75000, ComponentLink1Description="Manufacturer URL", ComponentLink1URL=http://www.we-online.com, ComponentLink2Description=Datasheet, ComponentLink2URL=http://katalog.we-online.com/led/datasheet/150120GS75000.pdf, PackageReference=1206_A
MOD1: "Power Supply", Manufacturer_Name="Mean Well", Mouser Part Number=709-IRM10-5, Arrow Part Number=IRM-10-5, Arrow Price/Stock=https://www.arrow.com/en/products/irm-10-5/mean-well-enterprises, Datasheet Link=https://www.meanwell-web.com/en/download_datasheet.php?products_id=IRM-10-5&type=3, Manufacturer_Part_Number=IRM-10-5, Mouser Price/Stock=https://www.mouser.co.uk/ProductDetail/MEAN-WELL/IRM-10-5?qs=WkdRfq4wf1Mbq1AdfDJBoQ%3D%3D
MOD2-: library part CMP-2000-06650-1, "Quad-Band GSM / GPRS Module, 850 / 900 / 1800 / 1900 MHz, 3.3 to 4.6 V, -40 to 85 degC, 42-Pin SMD, RoHS, Tape and Reel", Manufacturer=QUECTELWIRELESSSOLUTIONS, Operating Temperature=-40to85°C, Package=42LCC, Package Description="42-Pin Sourface Mount Device, Body 23.6 x 19.9 mm", Category=RFModulesMisc, Datasheet URL=https://www.codico.com/shop/media/datasheets/Quectel_M95_Hardware_Design_V3.1.pdf, Datasheet Version="Rev. 3.1, 11/2014", Manufacturer URL=http://www.quectel.com/, Mounting Technology=SurfaceMount, Package Reference=M95FA-03-STD
R1 R2 R4 R5 R7 R14 R15 R16 R17 R19 R20 R21: library part CMP-2005-03795-1, Manufacturer=Panasonic, Part Number=ERJ14BQF3R3U
R6: library part CMP-06022-000035-1, "ICL 5.1 OHM 15% 2.5A 10MM", Case/Package=Radial, Current Rating=2.5A, Max Operating Temperature=160°C, Min Operating Temperature=-20°C, Package Quantity=100, Resistance=5.1R, Tolerance=15%, Voltage=264V, Depth=5mm, Diameter=0.394inch, Lead Diameter=0.8mm, Lead Free="Lead Free", Lead Pitch=0.295inch, Mount="Through Hole", Number of Pins=2, Packaging=Bulk, Radiation Hardening=No, Thickness=5mm, Width=5mm
R8 R9: library part CMP-02408-000003-1, "RES 1.1K OHM 0.6W 1% AXIAL", Manufacturer="Vishay BC Components", Manufacturer Part Number=MRS25000C1101FCT00, Package=MRS25, Power Rating=0.6W, Resistance=1.1kΩ, Temperature="-55°C to +155°C", Temperature Coefficient=50ppm/°C, Temperature Range High=+155°C, Temperature Range Low=-55°C, Tolerance=1%, Voltage Rating=350V, Automotive=No, Category=Res, ComponentLink2Description=Datasheet, ComponentLink2URL=http://www.vishay.com/docs/28724/mrs16m25.pdf, Composition="Thin Film", Device Class L1="Passive Components", Device Class L2=Resistors, Device Class L3="Through-Hole Resistors", Digikey Description="RES 1.1K OHM 0.6W 1% AXIAL", Height=2.5mm, Ipc Land Pattern Name=RESAD1000W75L650D250, Lead Free=Yes, Mouser Description="Thin Film Resistors .6watt 1.1Kohms 1%", Octopart=https://octopart.com/mrs25000c1101fct00-vishay-43740214, RoHS=TRUE, Series=MRS25
R10 R11 R12 R13: library part CMP-2005-02079-1, Manufacturer="Vishay Dale", Part Number=CRCW121024R9FKEA
SIM1: library part CMP-1502-00158-1, "WR-CRD Micro SIM Card Connector, Push & Pull, with Card Detection", Manufacturer="Wurth Elektronik", Operating Temperature=-25to85degC, Rated Current=1A, Withstanding Voltage=500VAC, Working Voltage=30VAC, Datasheet URL=https://katalog.we-online.de/em/datasheet/693023010811.pdf, Manufacturer URL=http://www.we-online.de, Mounting Technology=SMT, Package Reference=693023010811, Packaging=TapeandReel, Part Number=693023010811, Publisher=WurthElektronik
SMA: "Connector", Manufacturer_Name=Molex, Mouser Part Number=538-73391-0070, Datasheet Link=https://www.mouser.com/datasheet/2/276/0733910070_RF_COAX_CONNECTORS-173128.pdf, Height=10mm, Manufacturer_Part_Number=73391-0070, Mouser Price/Stock=https://www.mouser.co.uk/ProductDetail/Molex/73391-0070?qs=Vtbn2VVmZzEJo591qvlOmw%3D%3D
T1: library part CMP-2000-04929-2, "MOSFET N-CH 60V 115MA SOT23-3", Case/Package=SOT-23, Continuous Drain Current (ID)=115mA, Drain to Source Breakdown Voltage=70V, Drain to Source Resistance=7.5R, Drain to Source Voltage (Vdss)=60V, Gate to Source Voltage (Vgs)=20V, Input Capacitance=50pF, Max Operating Temperature=150°C, Max Power Dissipation=300mW, Min Operating Temperature=-55°C, Package Quantity=3000, Power Dissipation=540mW, Threshold Voltage=2.5V, Contact Plating=Tin, Current Rating=115mA, Dual Supply Voltage=60V, Element Configuration=Single, Fall Time=5.6ns, Height=1mm, Lead Free="Lead Free", Length=2.9mm, Mount="Surface Mount", Nominal Vgs=2.5V, Number of Channels=1, Number of Elements=1, Number of Pins=3, On-State Resistance=7.5R, Packaging="Tape and Reel", Radiation Hardening=No, Rds On Max=7.5R, REACH SVHC="No SVHC", Rise Time=3ns, Termination=SMD/SMT, Turn-Off Delay Time=11ns, Turn-On Delay Time=7ns, Voltage=60V, Voltage Rating (DC)=60V, Weight=0.000282oz, Width=1.3mm
X1: library part CSTCC8M00G53-R0, "Crystal or Oscillator", Manufacturer_Name="Murata Electronics", Mouser Part Number=81-CSTCC8.00MG-TC, Arrow Part Number=CSTCC8M00G53-R0, Arrow Price/Stock=https://www.arrow.com/en/products/cstcc8m00g53-r0/murata-manufacturing, Datasheet Link=https://static6.arrow.com/aropdfconversion/88614e16d89192a4753a3252faaa6ecdd300b683/36382473867110040p16e_auto.pdf, Height=1.6mm, Manufacturer_Part_Number=CSTCC8M00G53-R0, Mouser Price/Stock=https://www.mouser.co.uk/ProductDetail/Murata-Electronics/CSTCC8M00G53-R0?qs=hDePDv5mxMFOvJFSEOl81A%3D%3D

## Via types
v1: diameter 25, hole 15, Top Layer to Bottom Layer, 45 vias
v2: diameter 210, hole 200, Top Layer to Bottom Layer, 4 vias
v3: diameter 19.68, hole 7.87, Top Layer to Bottom Layer, 4 vias
v4: diameter 50, hole 28, Top Layer to Bottom Layer, 1 vias
v5: diameter 30, hole 15, Top Layer to Bottom Layer, 1 vias

## Nets (pads, with @x,y where several pads share a name; then routed paths per layer and width w, separated by ;. In a path a pad name is that pad's centre, name@x,y a point inside that pad or via, vN(x,y) a via of type N, cw(c..) or ccw(c..) an arc to the next point about the centre after c; other vN are vias at no path point)
+2V8: C1.1 C21.2 IC2.4 IC2.6 IC4.2 IC5.5 K1.2 L2.1 LED3.2 LED4.2 LED5.2 R1.2 R7.2 | length 6648.7
  Top Layer w9: IC5.5 2397,2679.63 2397,2639.9 2402.27,2634.63 2672,2634.63 2715,2677.63 v1(2715,3160) ; LED4.2 LED4.2@2608.79,4968 ; C1.1 C1.1@2809.42,4673 ; C21.2@2937.84,4673 C21.2
  Top Layer w20: L2.1 1858.95,4104.43 1860.76,4106.24 1860.76,4286.15 K1.2 1820.72,4294 1809,4305.72 1809,4738.28 1821.53,4750.81 1986.29,4750.81 1988.1,4749 ; R1.2 1988.1,4749 ; IC2.6 2434.76,4301.39 2465.63,4332.27 2500,4332.27 ; IC2.4 2497.75,4330.01 2500,4332.27 ; LED4.2 LED5.2 1999.82,4969.79 1988.1,4958.07 1988.1,4749 ; LED4.2@2608.79,4968 2717.28,4968 2729,4956.28 2729,4682.29 2740.72,4670.58 C1.1 ; v1(2718,3477) 2718,3592.98 2787.92,3662.9 R7.2 3144.28,3662.9 3156,3674.61 3156,3823 ; C1.1@2809.42,4673 C21.2@2937.84,4673 ; IC4.2 3154.19,4431.6 3156,4429.79 3156,3823 ; 2500,4332.27 v1(2726,4332.27) 2791.02,4332.27 2823,4300.28 2823,3837.72 2834.72,3826 3153,3826 3156,3823
  Bottom Layer w20: v1(2715,3160) 2715,3472.65 2718,3475.65 v1(2718,3477) ; v1(2726,4332.27) 2726.96,4333.22 2726.96,4336.76 2728,4337.8 2728,4664.65 2727,4665.65 v1(2727,4667)
+4V4: C12.1 C13.1 C14.2 C15.1 C19.1 C20.2 IC4.3 IC5.6 IC5.10 MOD2-.33 MOD2-.34 | length 8967.3
  Top Layer w9: C14.2 C14.2@428,4009.1 ; C13.1@428,4181.54 C13.1@445,4198.54 ; 445,4413.73 450.27,4419 C12.1 ; IC5.10 2568.37,2758.37 2582,2772 v1(2582,2815) ; v1(2679.91,2817.41) v1@2681,2818.5
  Top Layer w10: IC5.6 2674.14,2679.63 2680.25,2685.74 2680.25,2817.06 v1(2679.91,2817.41)
  Top Layer w20: C15.1 427,3819 ; C14.2 427,3979.9 427,3819 ; C14.2@428,4009.1 C13.1@428,4181.54 ; C13.1@445,4198.54 445,4413.73 ; C12.1 562.51,4747.28 563.72,4748.49 650.27,4748.49 C19.1 694.75,4792.97 694.75,5021 3039.28,5021 3051,5009.28 3051,4771.01 3094.01,4728 C20.2 v1(3094,4566) ; MOD2-.33 MOD2-.34 648.27,2895.57 648.27,3801.28 630.56,3819 427,3819 ; v1@2681,2818.5 2681,3431.73 2686.27,3437 2762.73,3437 2762.73,3595.28 2774.44,3607 3180.28,3607 3192,3618.72 3192,3908.22 3191.5,3908.72 3191.5,4467.19 3193.31,4469 IC4.3 3213.12,4470 v1(3301,4470)
  Bottom Layer w9: v1(2582,2815) v1@2583.2,2816.2 ; v1@2678.7,2816.2 v1(2679.91,2817.41)
  Bottom Layer w20: v1@2583.2,2816.2 v1@2678.7,2816.2 ; 3108,4564 3109,4565 3289.28,4565 3301,4553.28 v1(3301,4470)
AREF: C22.1 IC2.18 IC2.20 L2.2 | length 995.6
  Top Layer w9: L2.2 1860.12,4033.57 L2.2@1867.43,4026.26 ; 2466.25,3887.25 IC2.20
  Top Layer w20: L2.2@1860.12,4035 1981,4035 ; C22.1 1981,4091.62 1981,4035 ; IC2.18@2402.95,3965 2402.95,3966.43 2421.58,3985.06 2451.47,3985.06 2466.25,3970.28 IC2.20 ; IC2.18 2403.26,3867.26 2388,3852 2167,3852 2156,3863 2061.72,3863 2049.35,3875.36 2049.35,3994.93 2010.72,4033.57 1981,4033.57 1981,4035
BT1_1: BT1.1 IC5.1 R14.1 | length 1923.3
  Top Layer w9: IC5.1 2397.58,2758.37 2398,2758.79 2398,2775.08 2403.27,2780.35 2546.73,2780.35 2555,2788.62 2555,2917.13 2570.03,2932.16 2570.03,3103.55 2564.76,3108.83 2511.92,3108.83 R14.1 2511.92,3195.86 R14.1@2519.07,3203
  Top Layer w20: R14.1@2519.07,3203 v1(2579,3203)
  Bottom Layer w20: BT1.1 2481.09,2518.09 2315.91,2518.09 2304,2530 2304,3162 2305,3161 2567.28,3161 2579,3172.72 v1(2579,3203)
CTS: IC2.26 MOD2-.23 | length 1915.4
  Top Layer w20: MOD2-.23 1711.72,3750.74 1723.44,3762.46 1779.82,3762.46 1781.27,3761 v1(1839,3761) ; IC2.26 2689.39,4015.26 2707.71,3996.94 2707.71,3849.06 2705,3846.35 v1(2705,3845)
  Bottom Layer w20: v1(1839,3761) 1949.04,3761 1952.04,3764 2694.24,3764 2705.96,3775.72 2705.96,3844.04 v1(2705,3845)
EMOFF: IC2.11 MOD2-.11 | length 2513.2
  Top Layer w9: MOD2-.11 1798.34,2371.68 MOD2-.11@1807.82,2381.17 ; 1877.73,2381.17 1883,2386.44 ; IC2.11@2313.08,4139.65 IC2.11
  Top Layer w20: MOD2-.11@1807.82,2381.17 1877.73,2381.17 ; 1883,2386.44 1883.5,2386.94 1883.5,3065.02 1882.34,3066.18 1882.34,3632.34 2079,3829 v1(2127,3829) ; v1(2251.06,4139.75) 2251.86,4140.55 2286.43,4140.55 2287.33,4139.65 IC2.11@2313.08,4139.65
  Bottom Layer w20: v1(2127,3829) 2402,3829 2432,3859 2432,4126.35 2418.6,4139.75 v1(2251.06,4139.75)
GND: BT1.2 C1.2 C2.2 C3.2 C4.2 C5.2 C6.2 C7.2 C8.2 C9.1 C10.2 C11.2 C12.2 C13.2 C14.1 C15.2 C18.2 C19.2 C20.1 C21.1 C22.2 D2.2 IC1.3 IC1.6 IC2.3 IC2.5 IC2.21 IC3.2 IC4.1 IC5.3 IC5.4 JP1.2 K1.6 L1.3 MOD2-.31 MOD2-.35 MOD2-.36 MOD2-.37 MOD2-.38 MOD2-.40 R4.1 R5.1 R15.1 R16.1 SIM1.C5 SMA.2 SMA.3 SMA.4 SMA.5 T1.2 X1.2 | length 23105.5
  Top Layer w9: C14.1@322.35,4011.72 C14.1 ; C12.2@322.35,4375.27 366.08,4419 C12.2 ; C19.2@367.63,4780.81 C19.2 ; 579.44,2857.54 584.71,2852.27 ; MOD2-.38 MOD2-.37 MOD2-.36 MOD2-.35 ; 1063.73,3994 1069,3988.73 ; 1069,3134.27 1074.27,3129 ; MOD2-.31@1211.72,3129 MOD2-.31 ; 1477,3969.24 1482.27,3974.51 ; IC3.2 IC3.2@2161,1565 ; 2340,2699.04 2340.27,2699.32 IC5.4 IC5.3 ; R16.1 R16.1@2399.72,2917 ; IC2.3@2528.22,4260.3 IC2.3 ; L1.3 L1.3@2883,3001.1 ; C18.2@2883,3110.94 C18.2 C18.2@2894.06,3122 ; C21.1 C21.1@2978.46,4506.4 ; C4.2@3154,3122 C4.2 C4.2@3170,3132 ; C5.2 C5.2@3170,3231 ; C3.2@3467,2763.71 3511.71,2719 C3.2 3543,2719 C3.2@3587.71,2763.71 ; R4.1@3587.71,3092 R4.1
  Top Layer w15: 1020.5,3994 D2.2 1063.73,3994
  Top Layer w20: C14.1@322.35,4011.72 C13.2 C12.2@322.35,4375.27 ; C14.1 328,3981.93 328,3826.62 319,3817.62 319,3603.72 330.72,3592 377.44,3592 SMA.2 SMA.3 ; C12.2 C19.2@367.63,4780.81 ; 579.44,2857.54 SMA.4 SMA.5 ; 584.71,2852.27 MOD2-.35 ; C8.2 C11.2 811.53,4582.56 816.8,4587.83 1007,4587.83 1007,4699.73 1012.27,4705 1654,4705 v4(1654,4489) 1654,4305.72 1642.28,4294 1610,4294 ; MOD2-.40 992,2494 972,2514 972,2560.61 992,2580.61 MOD2-.38 1198.42,2580.61 1210.14,2592.33 1210.14,3036.13 ; 1069,3134.27 1069,3988.73 ; 1074.27,3129 MOD2-.31@1211.72,3129 ; v1(1201,4412) 1201.64,4412.64 1201.64,4460.29 SIM1.C5 ; MOD2-.31 1210.14,3128.24 1210.14,3036.13 ; C9.1 1474,4170.06 1474,4228.28 1485.72,4240 1511.58,4240 1523.3,4251.72 1523.3,4285.3 C10.2 1610,4294 ; 1477,3969.24 1477,3036.13 1465.28,3024.41 1221.85,3024.41 1210.14,3036.13 ; 1482.27,3974.51 1610,3974.51 ; K1.6@1860.76,4486.15 K1.6 ; v1(2007,3909) 2007,3964.83 1997.31,3974.51 1610,3974.51 ; v1(2046,3722) 2480.28,3722 2494,3735.72 2494,3882.86 2495.57,3884.43 ; IC3.2@2161,1565 2348.73,1565 2354,1570.27 2354,2491 BT1.2 2340.72,2569 2329,2580.72 2329,2860 ; R16.1 2399.72,2868.61 2385.11,2854 2385.11,2860 2329,2860 ; IC2.5 2466.25,4203.25 2459,4196 ; IC2.21 2497.75,3996.28 2478.97,4015.06 2436.22,4015.06 2424.5,4026.78 2424.5,4184.28 2436.22,4196 2459,4196 ; IC2.3 2529.24,4216.72 2508.53,4196 2459,4196 ; v1@2551,3261 2550.14,3260.14 2461.14,3260.14 2447,3246 2447,3110.24 2428.91,3092.15 2366.83,3092.15 2329,3054.32 2329,2860 ; C1.2 2814.41,4545.05 2893.28,4545.05 2893.9,4544.43 2940.43,4544.43 C21.1 2962.27,4533.13 3013,4533.13 3013,4783 2982,4814 JP1.2 ; C6.2 2832,3490.77 2870.23,3529 2870.23,3520.5 v1(3031,3520.5) ; L1.3@2883,3001.1 C18.2@2883,3110.94 ; C18.2@2894.06,3122 3024.03,3122 ; C21.1@2978.46,4506.4 3067,4506.4 ; X1.2 3103.28,4068.8 3115,4080.52 3115,4350 3067,4398 3067,4506.4 ; v1(3029,3183) 3029,3126.97 3024.03,3122 ; C4.2@3154,3122 3024.03,3122 ; C4.2 3157,3103.25 3174,3086.25 3174,3017.33 3174.78,3016.55 3174.78,2947.64 3181.41,2941 3587.71,2941 ; C4.2@3170,3132 C5.2@3170,3231 ; C20.1 3219.99,4633.17 3237.71,4615.46 3265,4615.46 ; C2.2 3277.95,3371.84 3277.95,3422.72 3297.57,3442.33 3316.32,3442.33 3318.65,3440 v1(3320,3440) 3411.28,3440 3423,3451.72 IC1.3 IC1.6 3532,4189.5 R5.1 ; T1.2 3265,4615.46 ; C3.2@3587.71,2763.71 3587.71,2941 ; R4.1@3587.71,3092 3587.71,2941 ; 1610,3974.51 1610,4294 ; 3067,4506.4 IC4.1 3245.28,4506.4 3257,4518.12 3257,4607.46 3265,4615.46
  Bottom Layer w9: SMA.2 SMA.5
  Bottom Layer w20: v1(1002,3995) 1002,4400.28 1013.72,4412 1188,4412 ; v4(1654,4489) 1656.5,4491.5 1866.11,4491.5 K1.6 1868.61,5015.61 2976.28,5015.61 2988,5003.9 2988,4949.41 JP1.2 ; 2007,3891 1952,3836 1792,3836 1747,3791 1747,3690.72 1758.72,3679 1970,3679 2012.04,3721.04 2045.04,3721.04 v1(2046,3722) ; v1(2562,3261) 2620.28,3261 2632,3249.28 2632,3088 2661.28,3058.72 3029,3058.72 ; v1(3031,3520.5) 3031.96,3519.54 3031.96,3516.01 3033,3514.96 3033,3188.35 3029,3184.35 3029,3058.72 ; v1(3320,3440) 3320,3058.72 3308.28,3047 3040.72,3047 3029,3058.72
  other v2: 196.85,5118.11 3543.31,5118.11
IC2_23: IC2.23 R14.2 R15.2 | length 904.7
  Top Layer w9: R15.2@2399.72,3270.35 R15.2
  Top Layer w20: R14.2 R15.2@2399.72,3270.35 ; R15.2 2399.72,3485.28 2411.43,3497 2548.48,3497 2560.74,3509.26 IC2.23
IC3_3: IC2.1 IC3.3 R7.1 | length 3986.8
  Top Layer w20: IC2.1 2592.24,4241.67 2593.91,4240 2769.78,4240 2793,4216.78 v1(2793,3782) 2793.96,3781.04 2888.46,3781.04 R7.1@2894.95,3774.55
  Bottom Layer w9: IC3.3 1857,1639.73 1862.27,1645
  Bottom Layer w20: IC3.3 1855,1571 1855,1639.73 1855,3592.28 1866.72,3604 2781.28,3604 2793,3615.72 v1(2793,3782)
IC5_2: IC5.2 R16.2 R17.1 | length 742.5
  Top Layer w9: IC5.2 2365.27,2738.69 2360,2743.96 2360,2794.08 2365.27,2799.35 2506.65,2799.35 2511.92,2804.62 R16.2 2532.03,2889.11 2532.03,2921.03 2551.03,2940.03 2551.03,3087 2463,3087 2441,3065 2399.72,3065 R17.1
IC5_5: C4.1 C5.1 C6.1 IC1.4 LED1.2 LED2.1 R2.1 R17.2 | length 4042.3
  Top Layer w9: C6.1 C6.1@2833,3295 ; C4.1@3274,3117.89 C4.1 ; C5.1 C5.1@3277.11,3246 ; R2.1@3455.4,3246 3475.5,3266.11 R2.1
  Top Layer w20: v1(2458,2949) 2458.96,2949.96 2485.6,2949.96 2497.31,2961.67 2497.31,3004.39 R17.2 ; C6.1@2833,3295 3224.11,3295 C5.1 C4.1 ; v1(3274,2976) C4.1@3274,3117.89 ; C5.1@3277.11,3246 R2.1@3455.4,3246 ; LED2.1 3357.49,4969.3 3556.51,4969.3 LED1.2 3649.28,4969.79 3661,4958.07 3661,3798.72 3649.28,3787 3501.72,3787 3490,3775.28 IC1.4 3482,3661 3482,3275.5 R2.1
  Bottom Layer w20: v1(2458,2949) 3245.65,2949 3272.65,2976 v1(3274,2976)
IC5_9: IC2.24 IC5.9 | length 1308.1
  Top Layer w9: IC5.9 2501.36,2738.95 2606.73,2738.95 2612,2744.22 2612,3891.53 2606.22,3897.31 2598.99,3897.31 2592.24,3904.06 IC2.24
JP1_1: IC2.12 JP1.1 | length 1584.1
  Top Layer w9: v1(2426,4789) v1@2429,4786
  Top Layer w15: IC2.12 2225.79,4109.75 2217,4118.54 2217,4541.21 2225.79,4550 2423.73,4550 2429,4555.27 v1@2429,4786
  Bottom Layer w20: v1(2426,4789) 2431.27,4794.27 2431.27,4943.41 JP1.1
K2_1: K2.2 MOD1.1 R8.1 | length 4844.7
  Top Layer w9: R8.1 2457.15,697 2922.23,697 2927.5,702.27 2927.5,854.5 2946.5,873.5 3350.73,873.5 MOD1.1
  Bottom Layer w100: K2.2 712.74,1103 771.32,1044.42 771.32,604 2363.85,604 R8.1 ; 2457,668.32 3352.42,668.32 3411,726.9 3411,804.77 MOD1.1
K2_2: D1.1 F1.P$2 IC3.4 K2.1 | length 2683.8
  Top Layer w20: D1.1@1805,756.09 D1.1
  Top Layer w100: K2.1 529.42,853 588,794.42 588,445.63 1805,445.63 ; D1.1@1805,756.09 1805,445.63 ; D1.1 1857,808.09 IC3.4 ; F1.P$2 1805,445.63
LED3: IC2.14 R19.1 | length 680.4
  Top Layer w15: R19.1@2153,4570.61 2153,4055.54 2161.79,4046.76 IC2.14
LED4: IC2.9 R20.1 | length 639.7
  Top Layer w9: IC2.9 IC2.9@2318.38,4204.24
  Top Layer w20: IC2.9 2314.68,4487.32 2328.35,4501 2532,4501 2543.72,4512.72 2543.72,4579.4 2558.32,4594 R20.1
LED5: IC2.13 R21.1 | length 802.4
  Top Layer w10: 2182.79,4213.79 2183,4214 ; R21.1@2345.86,4593 R21.1
  Top Layer w15: 2182.79,4213.79 2182.79,4087.04 2191.58,4078.25 IC2.13 ; 2183,4214 2183,4587.14 2188.86,4593 R21.1@2345.86,4593
MISO: IC2.16 K1.1 | length 646
  Top Layer w15: K1.1 2087.07,4294 2095.85,4285.21 2095.85,3992.55 2104.64,3983.76 IC2.16
MOD1_2: C16.2 C17.2 L1.2 MOD1.2 | length 944.9
  Top Layer w9: L1.2 L1.2@2878,2791.9 ; C17.2@2878,2707.06 C17.2 C17.2@2881,2683.94 ; C16.2@2881,2566.65 C16.2
  Top Layer w50: C17.2@2878,2707.06 L1.2@2878,2791.9 ; C16.2@2881,2566.65 C17.2@2881,2683.94
  Top Layer w100: C16.2 2891.06,2506.58 2949.63,2448 3350.42,2448 3409,2389.42 3409,2330.98 MOD1.2
MOD1_3: C16.1 C17.1 L1.1 MOD1.3 | length 781.1
  Top Layer w9: C16.1 C16.1@2779,2562.65 ; C17.1@2779,2687.95 C17.1 C17.1@2780,2701.05 ; L1.1@2780,2789.83 L1.1
  Top Layer w50: C16.1@2779,2562.65 C17.1@2779,2687.95 ; C17.1@2780,2701.05 L1.1@2780,2789.83
  Top Layer w100: C16.1 2772.95,2383.33 2831.52,2324.75 MOD1.3
MOD1_4: MOD1.4 R6.2 | length 718.3
  Top Layer w100: MOD1.4 2992,691.31 3050.58,632.73 3454.64,632.73 R6.2
MOSI: IC2.15 K1.4 | length 912
  Top Layer w15: v1(2123,4444) 2123,4024.53 2132.27,4015.26 IC2.15
  Bottom Layer w20: K1.4 1876.46,4401.85 1876.46,4439.24 1880.72,4443.49 1893.55,4443.49 1894.06,4444 v1(2123,4444)
NetC2_1: C2.1 C3.1 C18.1 IC1.1 IC1.2 L1.4 | length 2010.2
  Top Layer w9: C18.1@2757.76,3134.19 C18.1@2788,3103.95 ; L1.4@2788,2996.07 L1.4@2790.66,2993.41 ; C3.1@3150.28,2763.71 3194.99,2719 C3.1
  Top Layer w20: C18.1@2757.76,3134.19 2757.76,3173.1 2716,3214.86 2716,3353.04 2763.06,3400.1 2900.94,3400.1 2909.04,3392 3147.32,3392 C2.1@3157,3382.31 ; L1.4@2788,2996.07 C18.1@2788,3103.95 ; L1.4 2790.66,2860.72 2802.38,2849 3138.28,2849 3150,2837.28 3150,2763.99 C3.1@3150.28,2763.71 ; C2.1@3160,3372 C2.1 C2.1@3157,3382.31 ; IC1.2 IC1.1 3278.5,3658.5 3278.5,3574.22 3277.28,3573 3168.72,3573 3157,3561.28 3157,3392 C2.1@3157,3382.31
NetD1_2: D1.2 IC3.1 R9.2 | length 1077.6
  Top Layer w9: R9.2@2455.7,1564 R9.2
  Top Layer w100: D1.2 2239.09,776 2215.58,776 2157,834.58 2157,1384.42 2215.58,1443 2398.42,1443 2457,1501.58 R9.2
NetF1_P$1: F1.P$1 R6.1 | length 241.6
  Top Layer w100: F1.P$1 2957,460.79 2968.61,472.4 2983.77,472.4 3030.37,519 R6.1
NetIC1_5: IC1.5 R2.2 R4.2 | length 688.2
  Top Layer w9: R2.2 R2.2@3591,3265.71
  Top Layer w20: R4.2 3475.51,3196.08 3480.78,3201.35 3585.73,3201.35 3591,3206.62 R2.2@3591,3265.71 ; IC1.5@3546.5,3658.5 IC1.5 3557,3610 3587.71,3579.29 R2.2
NetLED1_1: LED1.1 R5.2 | length 177.7
  Top Layer w9: R5.2 3557,4709.35
  Top Layer w20: 3557,4709.35 LED1.1
NetLED2_2: LED2.2 R13.2 | length 317.2
  Top Layer w20: R13.2 3295.76,4955.02 3307.47,4943.31 3307.47,4865.24 3325.72,4847 3352.82,4847 LED2.2
NetLED3_1: LED3.1 R19.2 | length 168.1
  Top Layer w9: R19.2 R19.2@2132,4706.2
  Top Layer w20: R19.2@2132,4706.2 LED3.1
NetLED4_1: LED4.1 R20.2 | length 156.3
  Top Layer w9: R20.2 2586.89,4706.21 R20.2@2607,4726.31
  Top Layer w20: R20.2@2607,4726.31 LED4.1
NetLED5_1: LED5.1 R21.2 | length 156.3
  Top Layer w9: R21.2 2349.39,4706.2 R21.2@2369.5,4726.31
  Top Layer w20: R21.2@2369.5,4726.31 LED5.1
NETLIGHT: MOD2-.13 T1.1 | length 3703.6
  Top Layer w9: T1.1 3330.23,4690.26 T1.1@3341.48,4701.51
  Top Layer w20: MOD2-.13 2070.28,2537.31 2082,2549.02 2082,3567.5 v1(2081.5,3568) ; T1.1 3328.26,4724.75 3339.02,4735.51 3365.51,4735.51 v1(3366.47,4736.47)
  Bottom Layer w20: v1(2081.5,3568) 2096.5,3553 3354.75,3553 3366.47,3564.72 v1(3366.47,4736.47)
NetR8_2: R8.2 R9.1 | length 78.1
  Top Layer w100: R8.2 R9.1
NetR10_2: R10.2 SIM1.C7 | length 1023.7
  Top Layer w20: R10.2 957,4495.35 965.56,4503.91 1059.73,4503.91 1065,4509.18 1065,4651 1082,4668 1413.54,4668 1418.81,4662.73 SIM1.C7
NetR11_1: R11.1 SIM1.C2 | length 198.5
  Top Layer w9: R11.1@1288.89,4315.09 1311.95,4292.03 R11.1
  Top Layer w20: R11.1@1288.89,4315.09 SIM1.C2
NetR12_1: R12.1 SIM1.C3 | length 374.7
  Top Layer w20: R12.1 1162.03,4287 1228,4287 ; SIM1.C3 1378.04,4458.4 1378.04,4416.96 v1(1379,4416)
  Bottom Layer w20: v1(1244,4286) 1244,4399.28 1260.72,4416 v1(1379,4416)
NetR13_1: R13.1 T1.3 | length 456.9
  Top Layer w9: R13.1 R13.1@3151.67,4813.31
  Top Layer w20: R13.1 3159.56,4832.98 3177.12,4815.42 3177.12,4779.88 3179,4778 3382,4778 3407,4753 T1.3
PWRKEY: IC2.10 MOD2-.10 | length 2320.5
  Top Layer w9: 1853.5,2431 1853.73,2431 1856.25,2433.52 1853.5,2436.27
  Top Layer w20: MOD2-.10 1755.03,2393.23 1763.58,2401.78 1763.58,2405.05 1783.94,2425.42 1847.92,2425.42 1853.5,2431 1853.5,3052.59 1852.34,3053.75 1852.34,3675.34 v1(2015,3838) ; IC2.10 2380.28,4172.74 2392,4161.03 v1(2392,4002)
  Bottom Layer w20: v1(2015,3838) 2015,3839.28 2100.84,3925.12 2177.72,4002 v1(2392,4002)
RESET: IC2.29 K1.5 R1.1 | length 1319.1
  Top Layer w9: K1.5 K1.5@1968.61,4495.39 ; IC2.29@2649.17,4109.91 IC2.29
  Top Layer w20: R1.1 1875.9,4570.72 1887.61,4559 1950,4559 1961.72,4547.28 1961.72,4500.9 K1.5 ; v1(2575.94,4108.75) 2577.29,4108.75 2578.29,4109.75 IC2.29
  Bottom Layer w20: K1.5 2563.22,4494 2575.94,4481.28 v1(2575.94,4108.75)
RF_ANT: MOD2-.39 SMA.1 | length 1870.3
  Top Layer w9: 479.44,2469.27 484.71,2464
  Top Layer w20: 479.44,2469.27 SMA.1 ; 484.71,2464 996.7,2464 1022.7,2438 1107.28,2438 1145,2475.72 1145,2525.59 1133.28,2537.31 MOD2-.39
RTS: IC2.25 MOD2-.24 | length 1845
  Top Layer w9: IC2.25 IC2.25@2658,3983.76
  Top Layer w20: MOD2-.24 1668.42,3641.42 v1(1669,3642) ; v1(2658,3690) IC2.25@2658,3983.76
  Bottom Layer w20: v1(1669,3642) 2646.28,3642 2658,3653.72 v1(2658,3690)
RXD: IC2.31 MOD2-.21 | length 1895.6